# Altium PCB ParrotPCB.PcbDoc
Units mil, origin at the board's own origin, x right, y up, seen from the top; angles counter-clockwise.
Board outline 2975 x 3603 mil, 2 copper layers (Top Layer, Bottom Layer); 33 components, 27 nets, 124 pads, 79 vias.
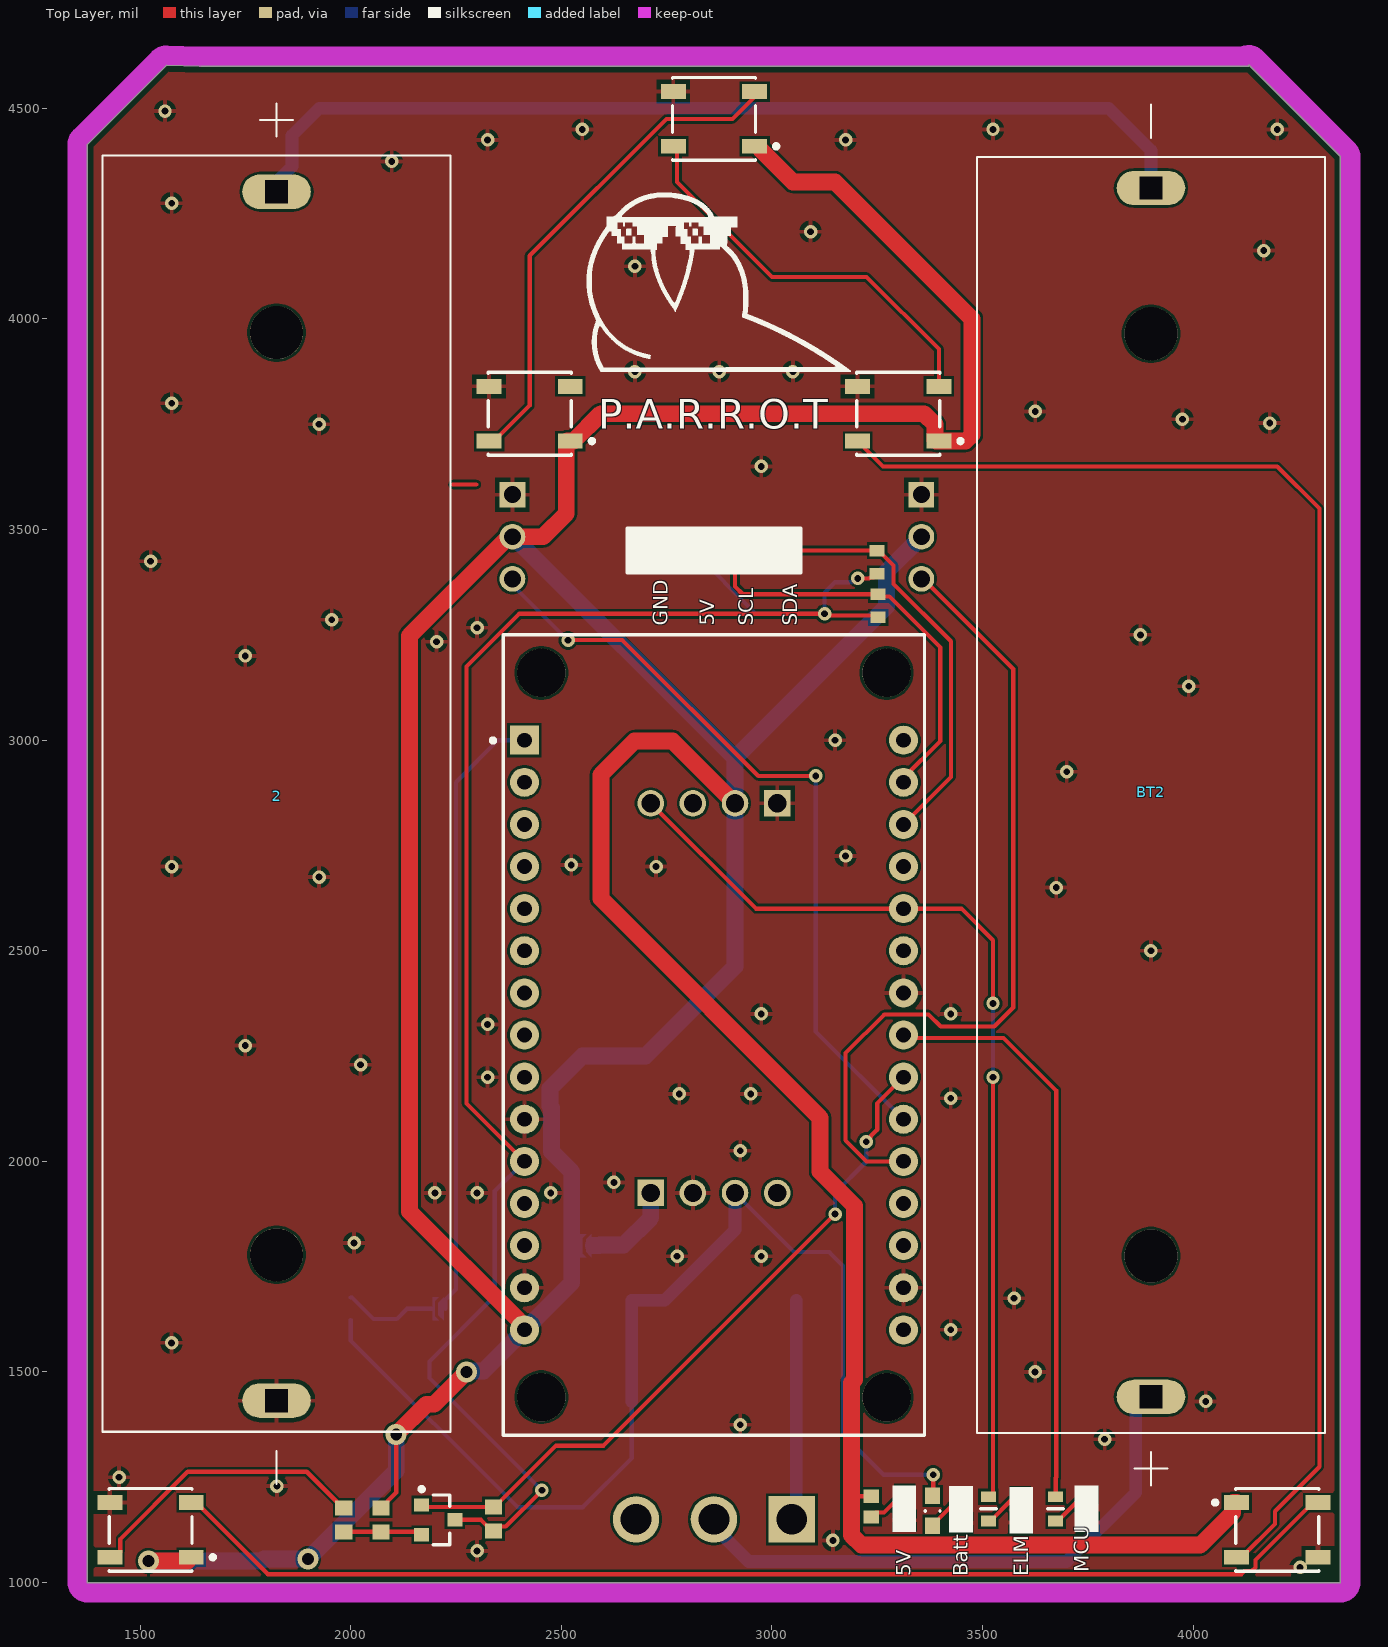
[diagram p0: Top Layer view]
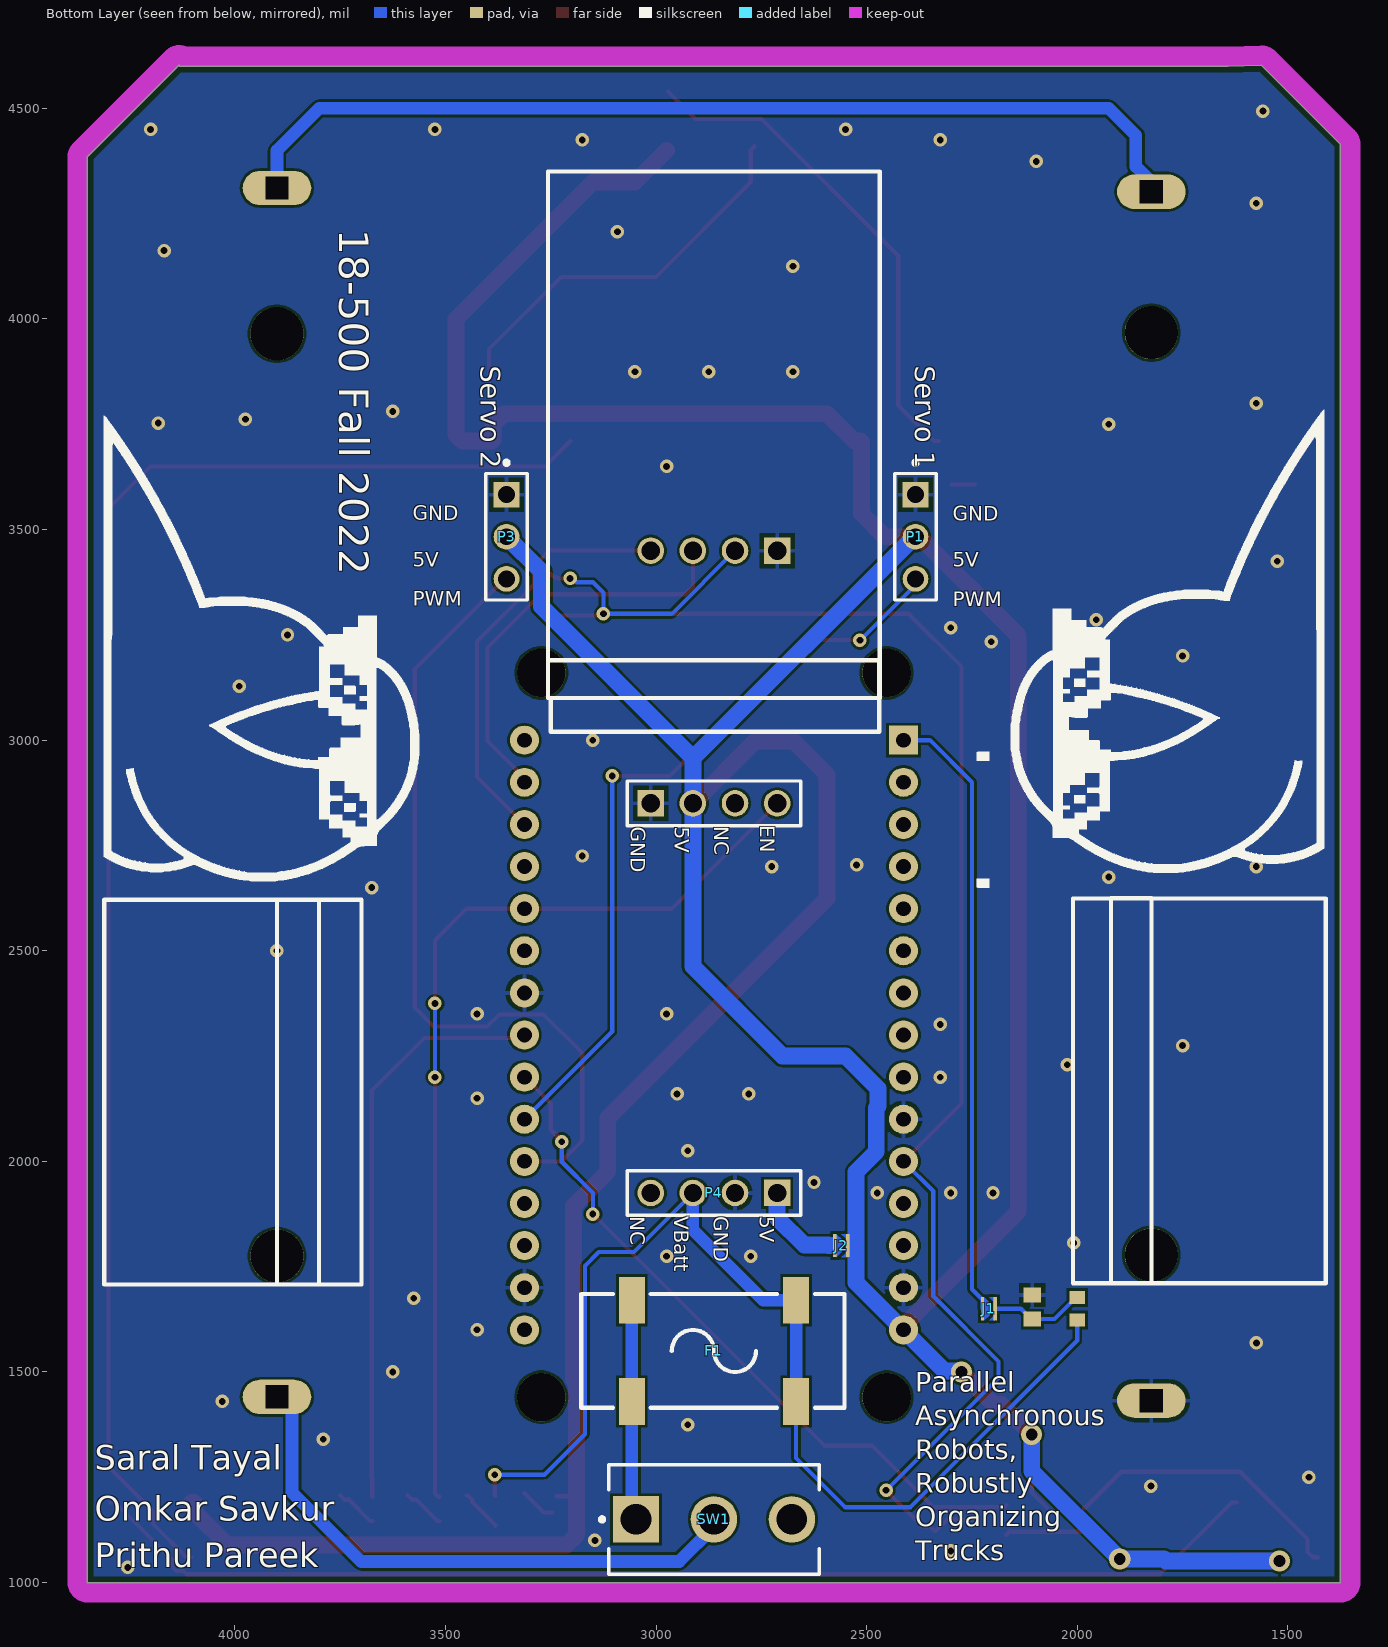
[diagram p1: Bottom Layer view, seen from below]
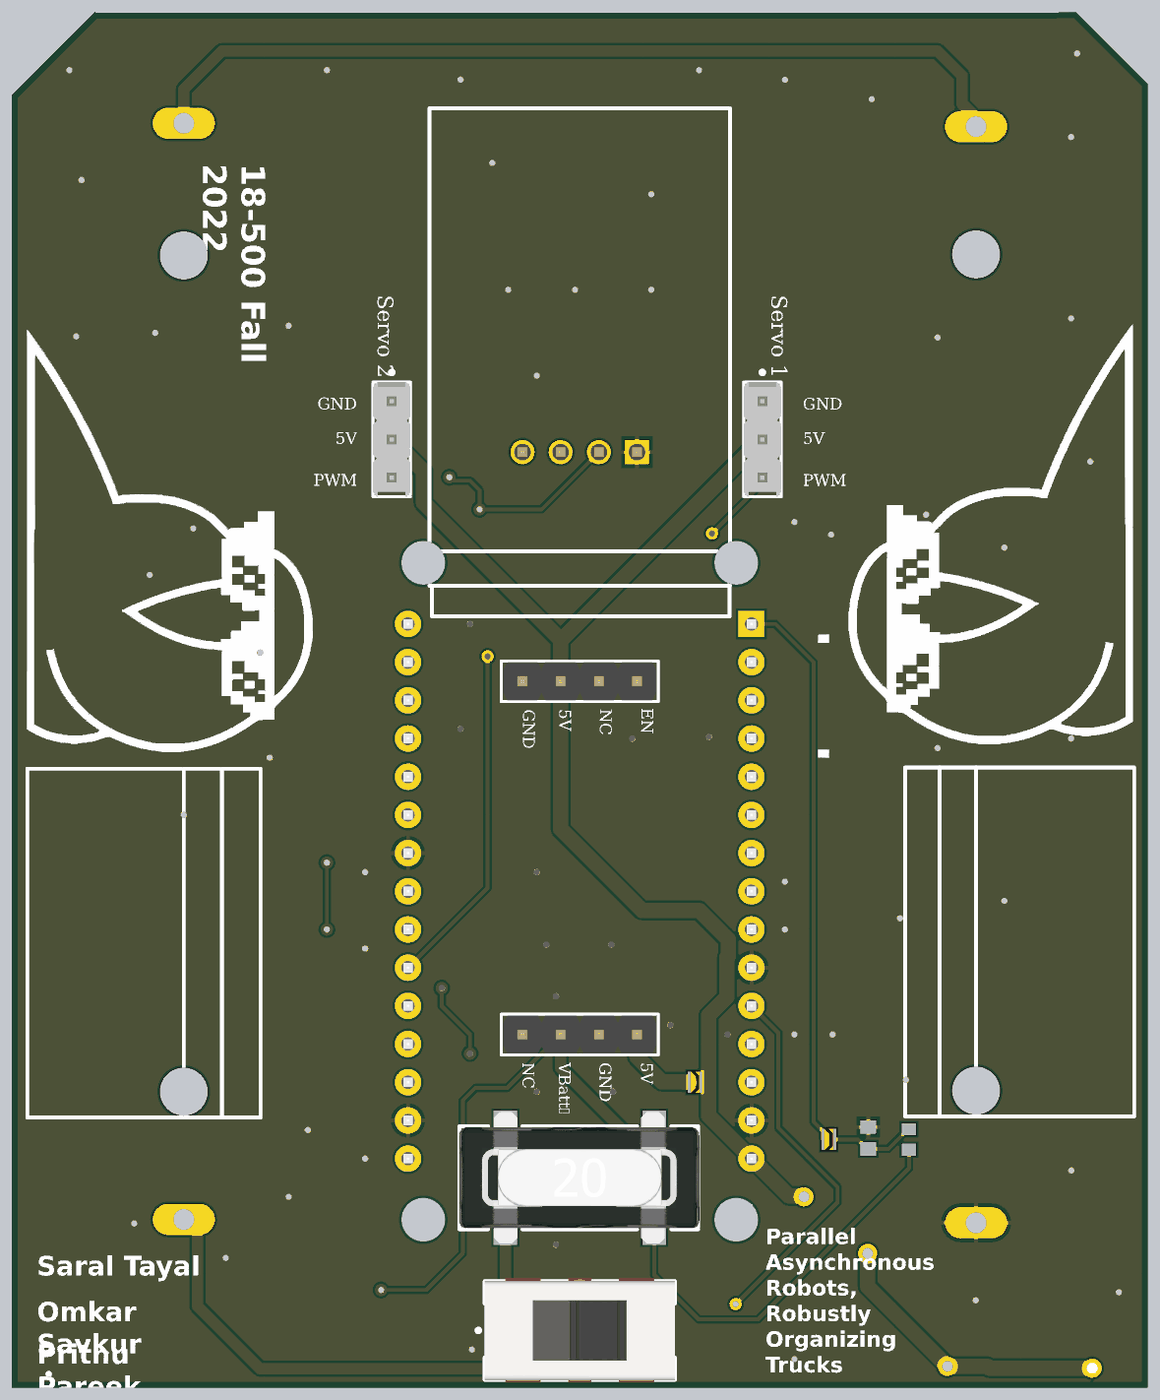
[diagram p2: 3D render of the assembled board from below, using the file's embedded part models]

## Layer stack, top to bottom
Top Solder: solder mask 0.4, Solder Resist, Dk 3.5
Top Layer: signal copper 1.4
Dielectric 1: dielectric 12.6, FR-4, Dk 4.8
Bottom Layer: signal copper 1.4
Bottom Solder: solder mask 0.4, Solder Resist, Dk 3.5

## Board outline
4350,4385 4132,4603 4132,4600 1644,4600 1562,4602 1375,4415 1375,1000 4350,1000

## Design rules (kind name [scope] priority, off if disabled: settings)
BoardOutlineClearance [All] p1: gap=15 ignorepadtopadclearanceinfootprint=FALSE
Clearance [All] p1: gap=6 ignorepadtopadclearanceinfootprint=FALSE
DiffPairsRouting [All] p1: maxlimit=8 minlimit=8 mostfreqgap=8 toplayer_minwidth=8 toplayer_maxwidth=8 toplayer_prefwidth=8 bottomlayer_minwidth=8 bottomlayer_maxwidth=8 bottomlayer_prefwidth=8 maxuncoupledlength=500
HoleSize [All] p1: absolutevalues=TRUE maxlimit=500 minlimit=10 maxpercent=80.000 minpercent=20.000
MinimumAnnularRing [All] p1: minimumring=5
MinimumSolderMaskSliver [All] p1 off: minsoldermaskwidth=4
NetAntennae NetAntennae_MountingHoles [IsVia And InComponent('M*')] p1: netantennaetolerance=-1
NetAntennae [All] p2: netantennaetolerance=0
PolygonConnect PolygonConnect_Relief [IsPad and not (InComponent('M*') or InNet('VBatt')or InNet('NetC19_1') or InNet('VCC5V'))] p1: connectstyle=Relief reliefconductorwidth=10 reliefentries=4 polygonreliefangle="90 Angle" airgapwidth=10
PolygonConnect PolygonConnect_Direct [All] p2: connectstyle=Direct reliefconductorwidth=10 reliefentries=4 polygonreliefangle="90 Angle" airgapwidth=10
RoutingVias [All] p1: holewidth=16 width=32 viastyle="Through Hole" minholewidth=16 minwidth=32 maxholewidth=100 maxwidth=200
ShortCircuit "Mounting Hole Exception" [IsVia And InComponent('M*') vs InComponent('M*')] p1: allowed=TRUE
ShortCircuit [All] p2: allowed=FALSE
SilkToSilkClearance [All] p1 off: silktosilkclearance=10
SilkToSolderMaskClearance [IsPad] p1 off: minsilkscreentomaskgap=10 clearancetoexposedcopper=TRUE
SolderMaskExpansion [All] p1: expansion=2 istentingtop=FALSE
Width [All] p1: maxlimit=500 minlimit=6 preferedwidth=10 minimp=50.000000 maximp=50.000000 favimp=50.000000
23 further rules are at their usual default settings.

## Classes and differential pairs
component class Main: BT1 BT2 D1 D2 D3 D4 F1 J1 J2 MD1 P1 P2 P3 P4 P5 Q1 R1 R2 R3 R4 R5 R6 R7 R8 R9 SW1 U1 U2 U3 U4 U5

## Components (designator, comment, footprint, x,y, rotation, side; value= is the part's Value field where it differs from the comment)
2 "30Q" BAT_BK-18650-PC2 1824,2872.94 r270 top (schematic designator BT1)
BT2 "30Q" BAT_BK-18650-PC2 3900,2870 r90 top
D1 "LED BLUE CLEAR CHIP SMD" DIOC1608X04N 3450,1174 r90 top
D2 "LED BLUE CLEAR CHIP SMD" DIOC1608X04N 3315.81,1180.11 r90 top
D3 "LED BLUE CLEAR CHIP SMD" DIOC1608X04N 3590,1175 r90 top
D4 "LED BLUE CLEAR CHIP SMD" DIOC1608X04N 3750,1175 r90 top
F1 "Fuse Holder 3588" "Fuse Holder 3588" 2862.5,1550 r180 bottom
J1 "(Open)" "Solder Jumper" 2194.49,1650 r0 bottom
J2 "(Open)" "Solder Jumper" 2545,1800 r0 bottom
MD1 "113990105" FP-113990105-MFG 2862.5,2300 r0 top
P1 "Servo1" MOLX-22-28-4033_V 2384,3483 r270 bottom
P2 "Electromagnet" 61300411121 2862.5,2850 r180 bottom
P3 "Servo2" MOLX-22-28-4033_V 3355,3483 r270 bottom
P4 "Voltage Regulator" 61300411121 2862.5,1925 r0 bottom
P5 "Screen" 61300411121 2862.5,3450 r0 top
Q1 "MOSFET N-CH 50V 220MA SOT-23" SOT90P240X110-3N 2208,1149 r0 top
R1 "280R" FP-RP73P-1J-MFG 3381.66,1170.27 r270 top value=280Ω
R2 "110R" RESC1609X50X30NL10T20 3235.81,1180.11 r90 top
R3 "27R" FP-ERJ3EK-MFG 3513.87,1175 r270 top
R4 "560kR" RESC1608X55X30NL15T15 2000,1650 r270 bottom
R5 "300kR" RESC1608X55X30ML15T15 2106.59,1654.17 r270 bottom
R6 "27R" FP-ERJ3EK-MFG 3673.87,1175 r270 top
R7 "470" RESC1608X55X30ML15T15 1984,1149 r270 top
R8 "1k5" RESC1608X55X25NL10T15 3252,3319 r270 top
R9 "1k5" RESC1608X55X25NL10T15 3250,3422.44 r270 top
R10 "10k" RESC1608X55X30ML15T15 2339,1151 r270 top
R11 "10k" RESC1608X55X30ML15T15 2072,1149 r90 top
SW1 "1101M2S3CQE2" FP-1101M2S3CQE2-MFG 2862.5,1150 r180 bottom
U1 "1655" ADA-RGB-1655_V 1525,1125 r180 top
U2 "1655" ADA-RGB-1655_V 4200,1125 r0 top
U3 "1655" ADA-RGB-1655_V 3300,3775 r180 top
U4 "1655" ADA-RGB-1655_V 2862.5,4475 r180 top
U5 "1655" ADA-RGB-1655_V 2425,3775 r180 top

## Footprints (in the part's own frame and the unit in brackets; to place one, negate y for a bottom-side part, rotate by r counter-clockwise, add the part's x,y. Pads: shape width x height; smd on the part's side, far side on the other; paste and mask are expansions set on the pad)
61300411121 [mm] "Pin Header, pitch 2.54 mm, THT, Vertical, single row, 4p"
  rect 1.6x1.6 hole 1.1: 1(-3.81,0)
  round 1.6 hole 1.1: 2(-1.27,0) 3(1.27,0) 4(3.81,0)
  silkscreen extent -5.23,-1.35 5.23,1.35, body extent -5.08,-1.27 5.08,1.27, height 8.57
ADA-RGB-1655_V [mm] "SMD, 4-Leads, Body 5x5mm"
  rect 1.5x0.9 smd: 1(-2.45,1.65) 2(-2.45,-1.65) 3(2.45,-1.65) 4(2.45,1.65)
  silkscreen extent -3.88,-2.5 2.5,2.5, body extent -2.7,-2.5 2.7,2.5, height 1.68
BAT_BK-18650-PC2 [mm]
  oval 2.07x4.14 hole 1.38 square: NEG(36.6,0) POS(-36.3,0)
  round 3.2 hole 3.2 unplated: ""(-27.805,0) ""(27.81,0)
  silkscreen extent -41.63,-10.49 41.63,10.49
DIOC1608X04N [mm] "Chip Diode, 2-Leads, Body 1.60x0.80mm, IPC Medium Density"
  rect 0.8x0.95 smd: 1(-0.825,0) 2(0.825,0)
  silkscreen extent -0.05,-0.38 0.05,0.38, body extent -0.8,-0.4 0.8,0.4, height 0.35
FP-1101M2S3CQE2-MFG [mm]
  rect 2.8x2.8 hole 1.85 paste-1000 mask+0: 1(-4.7,0)
  round 2.8 hole 1.85 paste-1000 mask+0: 2(0,0) 3(4.7,0)
  silkscreen extent -6.88,-3.3 6.35,3.3, body extent -6.35,-3.45 6.35,3.45, height 11.43
FP-113990105-MFG [mil]
  rect 69.02x69.02 hole 35 paste-39370.1 mask+0: 1(-450,700)
  round 69.02 hole 35 paste-39370.1 mask+0: 2(-450,600) 3(-450,500) 4(-450,400) 5(-450,300) 6(-450,200) 7(-450,100) 8(-450,0) 9(-450,-100) 10(-450,-200) 11(-450,-300) 12(-450,-400) 13(-450,-500) 14(-450,-600) 15(-450,-700) 16(450,-700) 18(450,-500) 19(450,-400) 20(450,-300) 21(450,-200) 22(450,-100) 23(450,0) 24(450,100) 25(450,200) 26(450,300) 27(450,400) 28(450,500) 29(450,600) 30(450,700)
  round 69.02 hole 35 mask+0: 17(450,-600)
  round 115 hole 115 unplated paste-39370.1 mask+0: ""(-410,-860) ""(-410,860) ""(410,-860) ""(410,860)
  silkscreen extent -530,-950 500,950, body extent -511,-978 511,958, height 10
FP-ERJ3EK-MFG [mm]
  rect 0.65x0.9 smd paste+0 mask+0: 1(-0.725,0) 2(0.725,0)
  silkscreen extent 0,-0.48 0,0.48, body extent -1.15,-0.58 1.15,0.58, height 0.25
FP-RP73P-1J-MFG [mm]
  rect 1x0.9 smd paste+0 mask+0: 1(-0.9,0) 2(0.9,0)
  silkscreen extent -0.03,-0.45 0.03,0.45, body extent -1.5,-0.55 1.5,0.55, height 0.25
"Fuse Holder 3588" [mil] "Keystone Electronics 3588 Automotive Blade Fuse Holder, SMT"
  rect 62x111 smd: 1(-195,-120) 1(-195,120) 2(195,-120) 2(195,120)
  silkscreen extent -315,-135 310,135, body extent -316,-173 314,172, height 686
MOLX-22-28-4033_V [mm] "THD, 3-Leads, Body 7.62x2.49mm, Pitch 2.54mm"
  rect 1.55x1.55 hole 1.02: 1(-2.54,0)
  round 1.55 hole 1.02: 2(0,0) 3(2.54,0)
  silkscreen extent -4.58,-1.24 3.81,1.24, body extent -3.81,-1.24 3.81,1.24, height 8.38
RESC1608X55X25NL10T15 [mm] "Chip Resistor, 2-Leads, Body 1.70x0.90mm, IPC Medium Density"
  rect 0.7x0.9 smd: 1(-0.7,0) 2(0.7,0)
  body extent -0.85,-0.45 0.85,0.45, height 0.55
RESC1608X55X30ML15T15 [mm] "Chip Resistor, 2-Leads, Body 1.60x0.80mm, IPC Low Density"
  rect 0.9x1.05 smd: 1(-0.725,0) 2(0.725,0)
  body extent -0.87,-0.48 0.87,0.48, height 0.55
RESC1608X55X30NL15T15 [mm] "Chip Resistor, 2-Leads, Body 1.60x0.80mm, IPC Medium Density"
  rect 0.8x0.95 smd: 1(-0.675,0) 2(0.675,0)
  body extent -0.87,-0.48 0.87,0.48, height 0.55
RESC1609X50X30NL10T20 [mm] "Chip Resistor, 2-Leads, Body 1.55x0.85mm, IPC Medium Density"
  rect 0.8x0.95 smd: 1(-0.625,0) 2(0.625,0)
  body extent -0.82,-0.48 0.82,0.48, height 0.5
"Solder Jumper" [mm]
  rect 0.2x1.4 smd paste+0: 1(0,0) 2(0.775,0)
  Top Layer region: 0.375,-0.7 0,-0.7 0,0.7 0.375,0.7 0.125,0.45 0.125,-0.45
  Top Layer region: 0.35,0.375 0.675,0.7 0.675,-0.7 0.35,-0.375
SOT90P240X110-3N [mm] "SOT23, 3-Leads, Body 2.90x2.40mm, Pitch 0.90mm, IPC Medium Density"
  rect 0.9x0.8 smd: 1(-1,0.9) 2(-1,-0.9) 3(1,0)
  silkscreen extent -1.12,-1.5 0.7,1.97, body extent -0.7,-1.5 0.7,1.5, height 1.1

## Part data
2 BT2: library part BK-18650-PC2, "Battery Holder (Open) 18650 1 Cell PC Pin", Package=None, Availability=Unavailable, MP=BK-18650-PC2, Price=None
D1 D2 D3 D4: library part LTST-C193TBKT-5A, "Blue 470nm LED Indication - Discrete 2.8V 0603 (1608 Metric)", Supplier Part Number 1=160-1827-6-ND, Supplier 1=Digi-Key
F1: library part "3588 Fuse Holder", "Keystone Electronics 3588", Supplier Part Number 1=36-3588-ND, Datasheet=http://keyelco.com/userAssets/file/M65p43.pdf, Supplier 1=Digi-Key
J1 J2: library part Jumper, "Jumper"
MD1: library part CMP-138991-000001-1, "NODEMCU V2 LUA BASED ESP8266 DEV", Frequency=2.4GHz, Series=-
P1 P3: library part CMP-1676-00001-5, "Male Header, Pitch 2.54 mm, 1 x 3 Position, Height 8.38 mm, Tail Length 3.18 mm, RoHS, Bulk", Colour=Black, Current Rating="4 A", Manufacturer=Molex, Max Operating Temperature="75 degC", Min Operating Temperature="0 degC", Package Quantity=1, Voltage Rating="250 V", ComponentLink1Description="Manufacturer URL", ComponentLink1URL=http://www.molex.com/, ComponentLink2Description=Datasheet, ComponentLink2URL=http://www.molex.com/pdm_docs/sd/022284033_sd.pdf, Contact Finish=Gold, Contact Material=Brass, Contact Plating=Gold, DatasheetVersion="Rev. G, 01/2012", Height="8.38 mm", Lead Pitch="0.1 inch", Length="7.62 mm", Mount="Through Hole", Mounting Technology="Through Hole", PackageDescription="Male Header, Pitch 2.54 mm, 1 x 3 Position, Height 8.38 mm, Tail Length 3.18 mm", PackageReference=22-28-4033, Packaging=Bulk, Pins=3, REACH SVHC=Unknown, RoHSCompliant=true, Rows=1
P2 P4 P5: library part CMP-1502-01064-1, "THT Vertical Pin Header WR-PHD, Pitch 2.54 mm, Single Row, 4 pins", Contact Resistance=20mOhm, Manufacturer="Wurth Elektronik", Operating Temperature=-40to105degC, Package Reference=61300411121, Rated Current=3A, Withstanding Voltage=500VAC, Working Voltage=250VAC, Datasheet URL=https://katalog.we-online.de/em/datasheet/6130xx11121.pdf, Gender=Male, Manufacturer URL=http://www.we-online.de, Mounting Technology=THT, Orientation=Vertical, Packaging=Bag, Part Number=61300411121, Pin Number=4, Pitch=2.54mm, Publisher=WurthElektronik, Row Number=Single
Q1: library part "BSS138 Fairchild", "N-Channel 220mA (Ta) 360mW (Ta) Surface Mount SOT-23-3", Supplier Part Number 1=BSS138CT-ND, Supplier 1=Digi-Key
R1: library part CMP-03211-006365-1, "RES SMD 280 OHM 0.1% 1/6W 0603", Manufacturer="TE Connectivity", Manufacturer Part Number=RP73PF1J280RBTDF, Package=RP73P-1J, Power Rating=0.166W, Resistance=280Ω, Temperature="-55°C to +155°C", Temperature Coefficient=25ppm/°C, Temperature Range High=+155°C, Temperature Range Low=-55°C, Tolerance=0.001, Voltage Rating=100V, Automotive=No, Category=Res, ComponentLink2Description=Datasheet, ComponentLink2URL=https://www.te.com/commerce/DocumentDelivery/DDEController?Action=srchrtrv&DocNm=1773272&DocType=DS&DocLang=English, Composition="Thin Film", Device Class L1="Passive Components", Device Class L2=Resistors, Device Class L3="Chip SMD Resistors", Digikey Description="RES SMD 280 OHM 0.1% 1/6W 0603", Height=0.55mm, Ipc Land Pattern Name=RESC15580X45, Lead Free=Yes, Octopart=https://octopart.com/rp73pf1j280rbtdf-te+connectivity-45465887, RoHS=TRUE, Series=RP73P
R2: library part CMP-2000-03854-1, Manufacturer="Vishay Dale", Part Number=CRCW0603110RFKEA
R3 R6: library part CMP-2000-00396-2, "RES SMD 27 OHM 1% 1/10W 0603", Case Code (Imperial)=0603, Case Code (Metric)=1608, Max Operating Temperature=155°C, Max Power Dissipation=100mW, Min Operating Temperature=-55°C, Package Quantity=1, Resistance Tolerance=1%, Resistor Type="Thick Film", Temperature Coefficient=100ppm/°C, Voltage Rating=75V, Case/Package=0603, Construction=Rectangular, Contact Plating=Tin, Depth=0.8mm, Features="Automotive AEC-Q200", Height=0.022inch, Lead Free="Lead Free", Length=1.6mm, Military Standard=Not, Mount="Surface Mount", Number of Pins=2, Number of Terminations=2, Packaging="Tape and Reel", Power Rating=100mW, Radiation Hardening=No, Resistance=27R, RoHS Compliant=Yes, Series=ERJ, Termination=SMD/SMT, Tolerance=1%, Voltage Rating (DC)=75V, Width=0.031inch
R4: library part CMP-2000-00567-1, Manufacturer=Panasonic, Part Number=ERJ3EKF5603V
R5: library part CMP-2000-00414-1, Manufacturer=Panasonic, Part Number=ERJ-3EKF3003V
R7 R10 R11: library part CMP-2000-00412-1, Manufacturer=Panasonic, Part Number=ERJ-3EKF3001V
R8 R9: library part CMP-1012-00595-2, "Chip Resistor, 5.6 KOhm, +/- 1%, 0.1 W, -55 to 155 degC, 0603 (1608 Metric), RoHS, Tape and Reel", Case Code (Imperial)=0603, Case Code (Metric)=1608, Max Operating Temperature="155 degC", Min Operating Temperature="-55 degC", Package Quantity=5000, Power Rating="100 mW", Resistance="332 kohm", Tolerance=1%, Type (Resistor)="Thick Film", Voltage Rating="50 V", Case\Package=0603, ComponentLink1Description="Manufacturer URL", ComponentLink1URL=http://www.yageo.com/, ComponentLink2Description=Datasheet, ComponentLink2URL=http://www.yageo.com/documents/recent/PYu-RC_Group_51_RoHS_L_04.pdf, DatasheetVersion="Rev. 4, 02/2016", Height="0.45 mm", Length="1.6 mm", PackageDescription="2-Pin Surface Mount Device, Body 1.6 x 0.8 mm", PackageReference=0603, Packaging="Tape and Reel", RoHSCompliant=true, Width="0.8 mm"
SW1: library part CMP-10038-000019-1, "SWITCH SLIDE SPDT 6A 120V", Actuator Color=Black, Contact Current Rating=6A, Contact Resistance=10mR, Flammability Rating="UL94 V-0", Insulation Resistance=1GR, Max Operating Temperature=65°C, Max Voltage Rating (AC)=250V, Max Voltage Rating (DC)=28V, Min Operating Temperature=-30°C, Package Quantity=1, Voltage Rating (AC)=120V, Actuator Length=5.08mm, Actuator Material=Nylon, Actuator Type=Standard, Approvals=UL, Body Material="Stainless Steel", Contact Material=Copper, Contact Plating=Silver, Current Rating=6A, Depth=6.6mm, Electrical Life=40000Cycles, Housing Material="Stainless Steel", Lead Free="Lead Free", Length=12.7mm, Max Current Rating=6A, Mount="Through Hole", Number of Poles=1, Number of Positions=3, Orientation=Vertical, Packaging=Bulk, REACH SVHC="No SVHC", Series=1000, Switch Function=On-On, Switch Travel=2.16mm, Termination="PC Pins", Throw Configuration=SPDT, Voltage Rating (DC)=28V
U1 U2 U3 U4 U5: library part CMP-2000-05026-1, "Intelligent Control LED Integrated Light Source, 3.5 to 5.3 V, -25 to 80 degC, 4-Pin SMD, RoHS, Tape and Reel", Color=Red,Green,Blue(RGB), Manufacturer=Adafruit-Industries-LLC, Package Description="4-Pin Surface Mount Device, Body 5 x 5 mm", Category=Optoelectronics, Configuration=Discrete, Controller Type=-, Datasheet URL=http://datasheet.octopart.com/ADA1655-Adafruit-Industries-datasheet-32028139.pdf, Datasheet Version=May-13, Family=Addressable,Specialty, Interface=-, Manufacturer URL=https://www.adafruit.com/, Mounting Type=SurfaceMount, Number of LEDs=10, Package Reference=1655, Series=Neopixel, Size / Dimension=5.00mmLx5.00mmW, Utilized LED=WS2812(5050)

## Via types
v1: diameter 32, hole 16, Top Layer to Bottom Layer, tented both sides, 72 vias
v2: diameter 50, hole 28, Top Layer to Bottom Layer, 4 vias
v3: diameter 32, hole 16, Top Layer to Bottom Layer, 3 vias

## Nets (pads, with @x,y where several pads share a name; then routed paths per layer and width w, separated by ;. In a path a pad name is that pad's centre, name@x,y a point inside that pad or via, vN(x,y) a via of type N, cw(c..) or ccw(c..) an arc to the next point about the centre after c; other vN are vias at no path point)
BATT_VSENSE: J1.2 MD1.1 | length 1464.3
  Bottom Layer w10: J1.2 2225,1671.5 2250,1696.5 2250,2900 2350,3000 MD1.1
ELECTROMAGNET_EN: MD1.26 P2.4 R3.1 | length 2275.1
  Top Layer w10: P2.4 2962.5,2600 MD1.26 3450,2600 3525,2525 v1(3525,2375) ; R3.1 3517.2,1203.54 3525,1211.34 v1(3525,2200)
  Bottom Layer w10: v1(3525,2200) v1(3525,2375)
GND: 2.NEG D1.1 D2.1 D3.1 D4.1 MD1.10 MD1.14 MD1.17 MD1.24 P1.1 P2.1 P3.1 P4.2 P5.1 R5.1 U1.3 U2.3 U3.3 U4.3 U5.3
  other v1: 4254,1036 2300,1075 3145,1100 1825,1229 1450,1250 3790,1340 2925,1375 4030,1430 3625,1500 1574.67,1569.06 3425,1600 3575,1675 2775,1775 2975,1775 2007.98,1806.35 2200,1925 2300,1925 2475,1925 2625,1950 2925,2025 3425,2150 2780,2160 2950,2160 2325,2200 2023.45,2229.33 1750,2275 2325,2325 2975,2350 3425,2350 3900,2500 3675,2650 1925,2675 1575,2700 2725,2700 2523.81,2703.9 3175,2725 3700,2925 3150,3000 3989.5,3128.15 1750,3200 2204,3234 3875,3250 2300,3267 1955.05,3285.94 1525,3425 2975,3650 1925,3750 4181.88,3752.93 3974.83,3762.13 3625.13,3780.54 1575,3800 2675,3875 2875,3875 3050,3875 2675,4125 4168.08,4162.44 3091.74,4207.26 1575,4275 2097.53,4374.09 2325,4425 3175,4425 2550,4450 3525,4450 4200,4450 1559.19,4493.72
MCU_LED: MD1.23 R6.1 | length 1382.2
  Top Layer w10: MD1.23 3319.31,2293.19 3550,2293.19 3675,2168.19 3675,1250 3673.87,1248.87 R6.1
NeoPixelData: R7.1 U1.4 | length 692.7
  Top Layer w10: U1.4 1440.35,1060.04 1453.07,1072.76 1453.07,1103.07 1613,1263 1895.59,1263 1981.05,1177.54 R7.1
NeoPixelData_MCU: MD1.22 Q1.1 R10.1 | length 1652.5
  Top Layer w10: Q1.1 2173.52,1179.54 R10.1 ; R10.1@2347.84,1185.43 2487.41,1325 2600,1325 v1(3150,1875) ; v1(3224,2046.58) 3224,2049 3250,2075 3250,2137.5 MD1.22
  Bottom Layer w10: v1(3150,1875) 3150,1925 3224,1999 v1(3224,2046.58)
NetBT1_POS: 2.POS BT2.NEG | length 2319.4
  Bottom Layer w30: 2.POS@1825,4329.13 1827.72,4329.13 1860.75,4362.16 1860.75,4435.75 1925,4500 3800,4500 3900,4400 BT2.NEG
NetBT2_POS: BT2.POS SW1.2 | length 1364.5
  Bottom Layer w30: SW1.2 2862.5,1132.52 2945.02,1050 3700,1050 3864.25,1214.25 3864.25,1407.84 3897.28,1440.87 BT2.POS
NetD1_2: D1.2 R1.2 | length 101.7
  Top Layer w10: R1.2 3381.66,1136.8 3436.3,1191.44 3436.3,1195.73 3447.05,1206.48 D1.2
NetD2_2: D2.2 R2.1 | length 85.5
  Top Layer w10: R2.1@3246.56,1166.26 3266.52,1166.26 D2.2@3312.86,1212.59
NetD3_2: D3.2 R3.2 | length 101.4
  Top Layer w10: R3.2 3518.8,1146.46 3569.07,1196.73 3579.25,1196.73 D3.2
NetD4_2: D4.2 R6.2 | length 101.4
  Top Layer w10: R6.2 3678.8,1146.46 3729.07,1196.73 3739.25,1196.73 D4.2
NetJ1_1: J1.1 R4.1 R5.2 | length 225.7
  Bottom Layer w10: R4.1 2002.95,1676.57 2053.9,1625.63 R5.2 2109.55,1625.63 2133.92,1650 J1.1
NetJ2_2: J2.2 P4.1 | length 223
  Bottom Layer w40: J2.2@2575.92,1800 2590.25,1800 2591.57,1801.32 2647.82,1801.32 2712.57,1866.08 2712.57,1924.93 P4.1
NetQ1_2: Q1.2 R7.2 R11.1 | length 187.5
  Top Layer w10: R7.2 R11.1 2161.74,1120.46 Q1.2
NetU1_2: U1.2 U2.4 | length 2825.9
  Top Layer w10: U1.2 1633.27,1189.96 1803.23,1020 4114.69,1020 4122.01,1027.32 4139.28,1027.32 4148.07,1036.11 4148.07,1053.39 4284.65,1189.96 U2.4
NetU2_2: U2.2 U3.4 | length 3741
  Top Layer w10: U3.4 3263.58,3650 4200,3650 4300,3550 4300,1275 4194.39,1169.39 4194.39,1139.08 4115.35,1060.04 U2.2
NetU3_2: U3.2 U4.4 | length 963
  Top Layer w10: U4.4 2775,4401.08 2775,4325 3000,4100 3225,4100 3396.46,3928.54 U3.2
NetU4_2: U4.2 U5.4 | length 1194.8
  Top Layer w10: U5.4 2340.35,3710.04 2425,3794.69 2425,4150 2750,4475 2906.5,4475 U4.2@2971.46,4539.96
SCREEN_SCL: MD1.29 P5.3 R8.1 | length 988.8
  Top Layer w10: P5.3 2912.5,3365.06 2931,3346.56 R8.1 3257.42,3341.14 3278.86,3341.14 3400,3220 3400,2998.35 3312.5,2910.85 MD1.29
SCREEN_SDA: MD1.28 P5.4 R9.1 | length 1012.8
  Top Layer w10: P5.4 R9.1@3253.94,3450 ; R9.1 R9.1@3253.94,3450 ; MD1.28 3425,2912.5 3425,3235 3289,3371 3289,3414.54 3262.72,3440.83 3262.72,3441.22 R9.1@3253.94,3450
SERVO_PWM1: MD1.21 P1.3 | length 1793
  Top Layer w10: v3@2519,3238 2644.59,3238 2967.59,2915 v3(3104,2915)
  Bottom Layer w10: P1.3@2393.76,3359.24 v3(2516,3237) ; v3(3104,2915) 3104,2308.5 MD1.21
SERVO_PWM2: MD1.20 P3.3 | length 1940.6
  Top Layer w10: MD1.20 3225,2000 3175,2050 3175,2257 3267,2349 3372,2349 3401,2320 3528,2320 3573,2365 3573,3169 P3.3@3357.62,3384.38
VBATT: F1.1 SW1.1 | length 524.1
  Bottom Layer w10: SW1.1 SW1.1@3057.5,1159.96
  Bottom Layer w30: SW1.1@3057.5,1159.96 3057.5,1430 F1.1@3057.5,1670
VBATT_POST_FUSE: F1.2 P4.3 R1.1 R4.2 | length 2737.4
  Top Layer w10: R1.1 3383,1207.04 v1(3383,1256)
  Bottom Layer w10: R4.2 2000,1575 2396,1179 2551,1179 2667.5,1295.5 F1.2@2667.5,1430 ; P4.3 3052.5,1785 3136,1785 3169,1752 3169,1352 3265,1256 v1(3383,1256)
  Bottom Layer w30: F1.2@2667.5,1430 2667.5,1670 2745,1670 2912.5,1837.5 P4.3
VCC_3V3: MD1.11 P5.2 Q1.3 R8.2 R9.2 R10.2 | length 4075.1
  Top Layer w10: Q1.3 2309.5,1149 2336.05,1122.46 R10.2 2349.57,1133.03 2368.03,1133.03 v3(2454,1219) ; MD1.11 2275,2137.5 2275,3175 2400,3300 v1(3125,3300) 3129.21,3295.79 3247.65,3295.79 R8.2 ; v1(3204.19,3384.04) 3231.43,3384.04 3233.49,3386.1 3241.22,3386.1 R9.2
  Bottom Layer w10: MD1.11 2342,1929.5 2342,1680 2187,1525 2187,1486 v3(2454,1219) ; P5.2 2962.5,3300 v1(3125,3300) 3125,3350 3150,3375 3189.21,3375 3198.24,3384.04 v1(3204.19,3384.04)
VCC_5V: J2.1 MD1.15 P1.2 P2.2 P3.2 R2.2 R11.2 U1.1 U2.1 U3.1 U4.1 U5.1 | length 12519.5
  Top Layer w10: U1.1@1612.66,1051.25 U1.1 ; R11.2 2108.11,1213.65 v2(2108.11,1351.85) ; 3189,1206 3190.28,1204.72 R2.2
  Top Layer w40: v2(1519.85,1051.25) U1.1@1612.66,1051.25 ; v2(2108.11,1351.85) 2179.48,1423.22 2198.22,1423.22 v2(2275,1500) ; P1.2@2379.5,3487.5 2139.98,3247.98 2139.98,1881.29 2397.99,1623.28 2397.99,1622.36 2412.5,1607.85 MD1.15 ; P1.2 2457,3483 2511.93,3537.93 2511.93,3707.76 2514.21,3710.04 U5.1 2528.7,3710.04 2593.66,3775 3361.21,3775 3386.93,3749.29 3386.93,3712.32 3389.21,3710.04 U3.1 3460.04,3710.04 3475,3725 3475,4000 3150,4325 3050,4325 U4.1@2975,4400 ; P2.2 2764.5,2998 2674,2998 2594,2918 2594,2624 3114.49,2103.51 3114.49,1975.57 3196,1894.05 3196,1481.59 3189,1474.59 3189,1206 3189,1112.3 3212.43,1088.87 4017.23,1088.87 4094.02,1165.66 4094.02,1187.68 4096.3,1189.96 U2.1
  Bottom Layer w40: v2(1519.85,1051.25) 1789,1051.25 1793.75,1056 v2(1899,1056) 2108.11,1265.11 v2(2108.11,1351.85) ; v2(2275,1500) 2277.5,1502.5 2315,1502.5 MD1.15 2525,1712.5 2525,1975 2477.01,2022.99 2477.01,2126.72 2472.99,2130.74 2472.99,2172.99 2550,2250 2700,2250 2912.5,2462.5 P2.2 2912.5,2957.5 3272,3317 3272,3400 P3.2 ; P1.2@2384,3482.69 2387,3482.69 2912.5,2957.19
pads on no net: 2. BT2. MD1. MD1.2 MD1.3 MD1.4 MD1.5 MD1.6 MD1.7 MD1.8 MD1.9 MD1.12 MD1.13 MD1.16 MD1.18 MD1.19 MD1.25 MD1.27 MD1.30 P2.3 P4.4 SW1.3 U5.2
copper on no net: | length 55
  Top Layer w10: 2243,3607 2298,3607

## Polygon pours and split planes (outlines as drawn)
GND on Bottom Layer "GND_L02_P001" (solid, pour order 4): 4350,4600 1375,4600 1375,1000 4350,1000
GND on Top Layer "GND_L01_P001" (solid, pour order 2): 4350,4600 1375,4600 1375,1000 4350,1000

## Keep-outs
Keep-Out Layer:
  lines w47.24: 1351.38,1000 ccw(c1375,1000) 1375,976.38 ; 1351.38,1000 ccw(c1375,1000) 1375,976.38 ; 1351.38,1000 1351.38,4415 ; 1351.38,4415 cw(c1375,4415) 1358.3,4431.7 ; 1351.38,4415 cw(c1375,4415) 1358.3,4431.7 ; 1358.3,4431.7 1545.3,4618.7 ; 1375,976.38 4350,976.38 ; 1545.3,4618.7 cw(c1562,4602) 1562.58,4625.62 ; 1545.3,4618.7 cw(c1562,4602) 1562.58,4625.62 ; 1562.58,4625.62 1644.29,4623.62 4120.48,4623.62 ; 4120.48,4623.62 cw(c4132,4603) 4148.7,4619.7 ; 4120.48,4623.62 cw(c4132,4603) 4148.7,4619.7 ; 4148.7,4619.7 4366.7,4401.7 ; 4350,976.38 ccw(c4350,1000) 4373.62,1000 ; 4350,976.38 ccw(c4350,1000) 4373.62,1000 ; 4366.7,4401.7 cw(c4350,4385) 4373.62,4385 ; 4366.7,4401.7 cw(c4350,4385) 4373.62,4385 ; 4373.62,1000 4373.62,4385

## Silkscreen, mask and mechanical layers (free items; w line width, h text height)
Top Overlay:
  drawing of 8 lines, arcs and shapes, not listed
  text "P.A.R.R.O.T" at 2587.97,3716 h120
  text "GND" at 2765,3271.38 h60 r90
  text "5V" at 2875,3271.19 h60 r90
  text "SCL" at 2968,3271.38 h60 r90
  text "SDA" at 3072,3271.38 h60 r90
  text "MCU" at 3764.66,1025.03 h60 r90
  text "5V" at 3342,1015 h60 r90
  text "Batt" at 3477,1015 h60 r90
  text "ELM" at 3620,1015 h60 r90
Bottom Overlay:
  drawing of 36 lines, arcs and shapes, not listed
  text "18-500 Fall 2022" at 3775.5,4213 h120 r90
  text "Servo 1" at 2400.15,3889.41 h80 r90
  text "Servo 2" at 3432.07,3889.41 h80 r90
  text "GND" at 3578,3510 h60
  text "GND" at 2296.08,3509.41 h60
  text "5V" at 3578,3400 h60
  text "5V" at 2296.08,3399.41 h60
  text "PWM" at 3578,3307 h60
  text "PWM" at 2296.08,3306.41 h60
  text "EN" at 2765,2798 h60 r90
  text "NC" at 2874,2796 h60 r90
  text "5V" at 2968,2795 h60 r90
  text "GND" at 3072,2794.62 h60 r90
  text "5V" at 2766,1870 h60 r90
  text "GND" at 2875,1870 h60 r90
  text "VBatt" at 2969,1870 h60 r90
  text "NC" at 3073,1870 h60 r90
  text "Saral Tayal" at 4333.03,1247.13 h100
  text "Omkar Savkur" at 4333.03,1127.13 h100
  text "Parallel / Asynchronous / Robots, / Robustly / Organizing / Trucks" at 2384,1037.76 h80
  text "Prithu Pareek" at 4333.03,1015.85 h100
Board-outline:
  lines w47.24: 1351.38,1000 ccw(c1375,1000) 1375,976.38 ; 1351.38,1000 ccw(c1375,1000) 1375,976.38 ; 1351.38,1000 1351.38,4415 ; 1351.38,4415 cw(c1375,4415) 1358.3,4431.7 ; 1351.38,4415 cw(c1375,4415) 1358.3,4431.7 ; 1358.3,4431.7 1545.3,4618.7 ; 1375,976.38 4350,976.38 ; 1545.3,4618.7 cw(c1562,4602) 1562.58,4625.62 ; 1545.3,4618.7 cw(c1562,4602) 1562.58,4625.62 ; 1562.58,4625.62 1644.29,4623.62 4120.48,4623.62 ; 4120.48,4623.62 cw(c4132,4603) 4148.7,4619.7 ; 4120.48,4623.62 cw(c4132,4603) 4148.7,4619.7 ; 4148.7,4619.7 4366.7,4401.7 ; 4350,976.38 ccw(c4350,1000) 4373.62,1000 ; 4350,976.38 ccw(c4350,1000) 4373.62,1000 ; 4366.7,4401.7 cw(c4350,4385) 4373.62,4385 ; 4366.7,4401.7 cw(c4350,4385) 4373.62,4385 ; 4373.62,1000 4373.62,4385